# Altium PCB PCB1.PcbDoc
Units mm, origin at the board's own origin, x right, y up, seen from the top; angles counter-clockwise.
Board outline 81.69 x 40.11 mm, 2 copper layers (Top Layer, Bottom Layer); 24 components, 4 nets, 128 pads, 12 vias.
Unrouted connection lines stored in the file: 12.
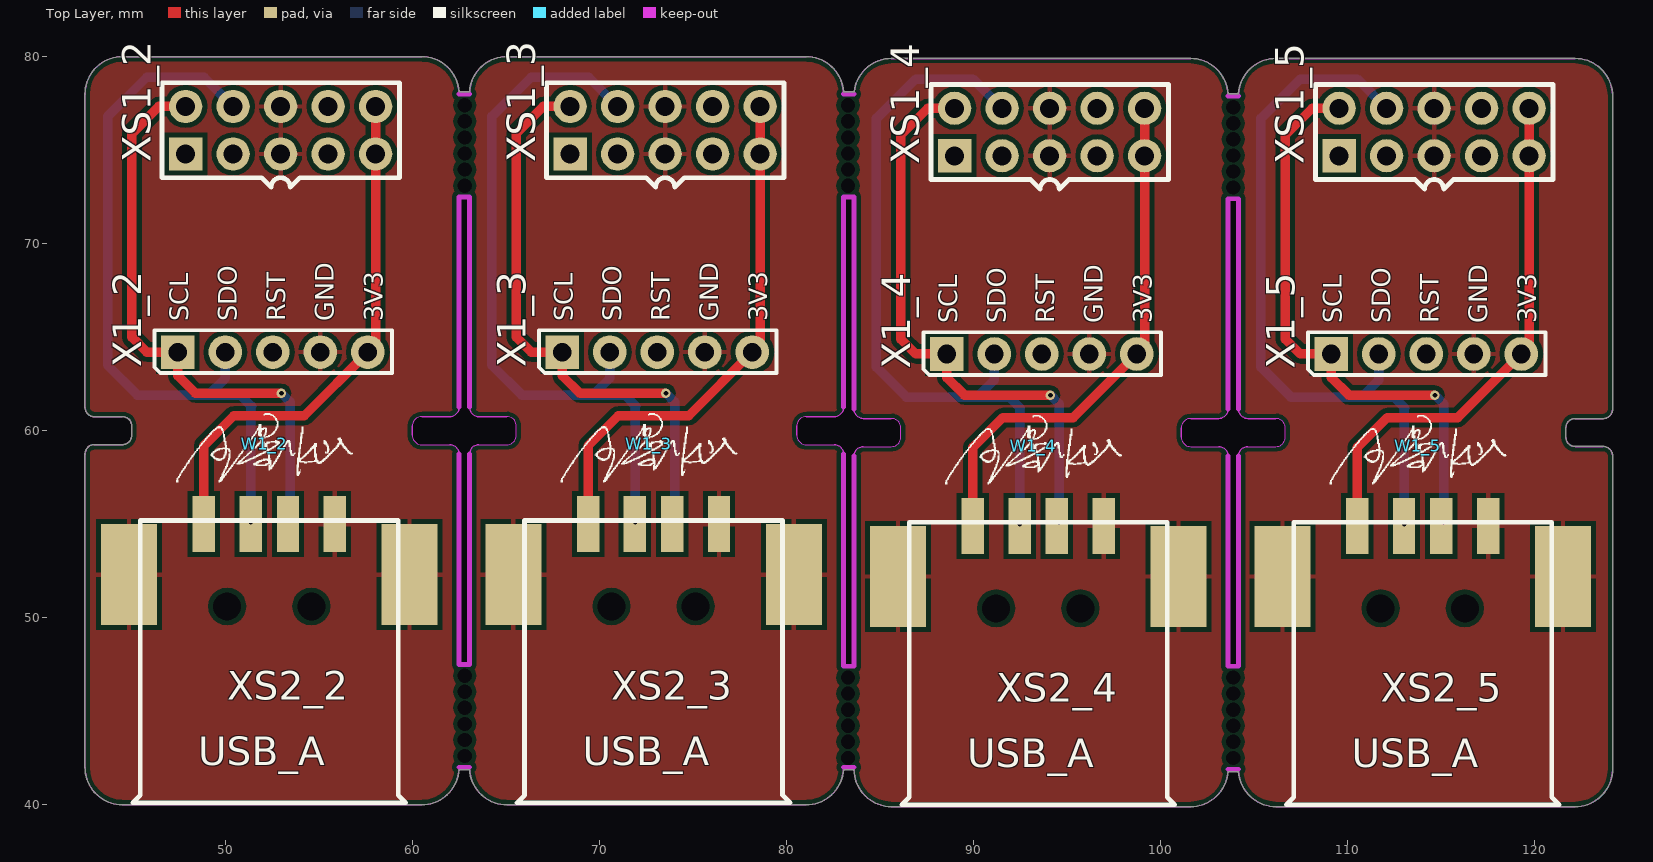
[diagram p0: Top Layer view]
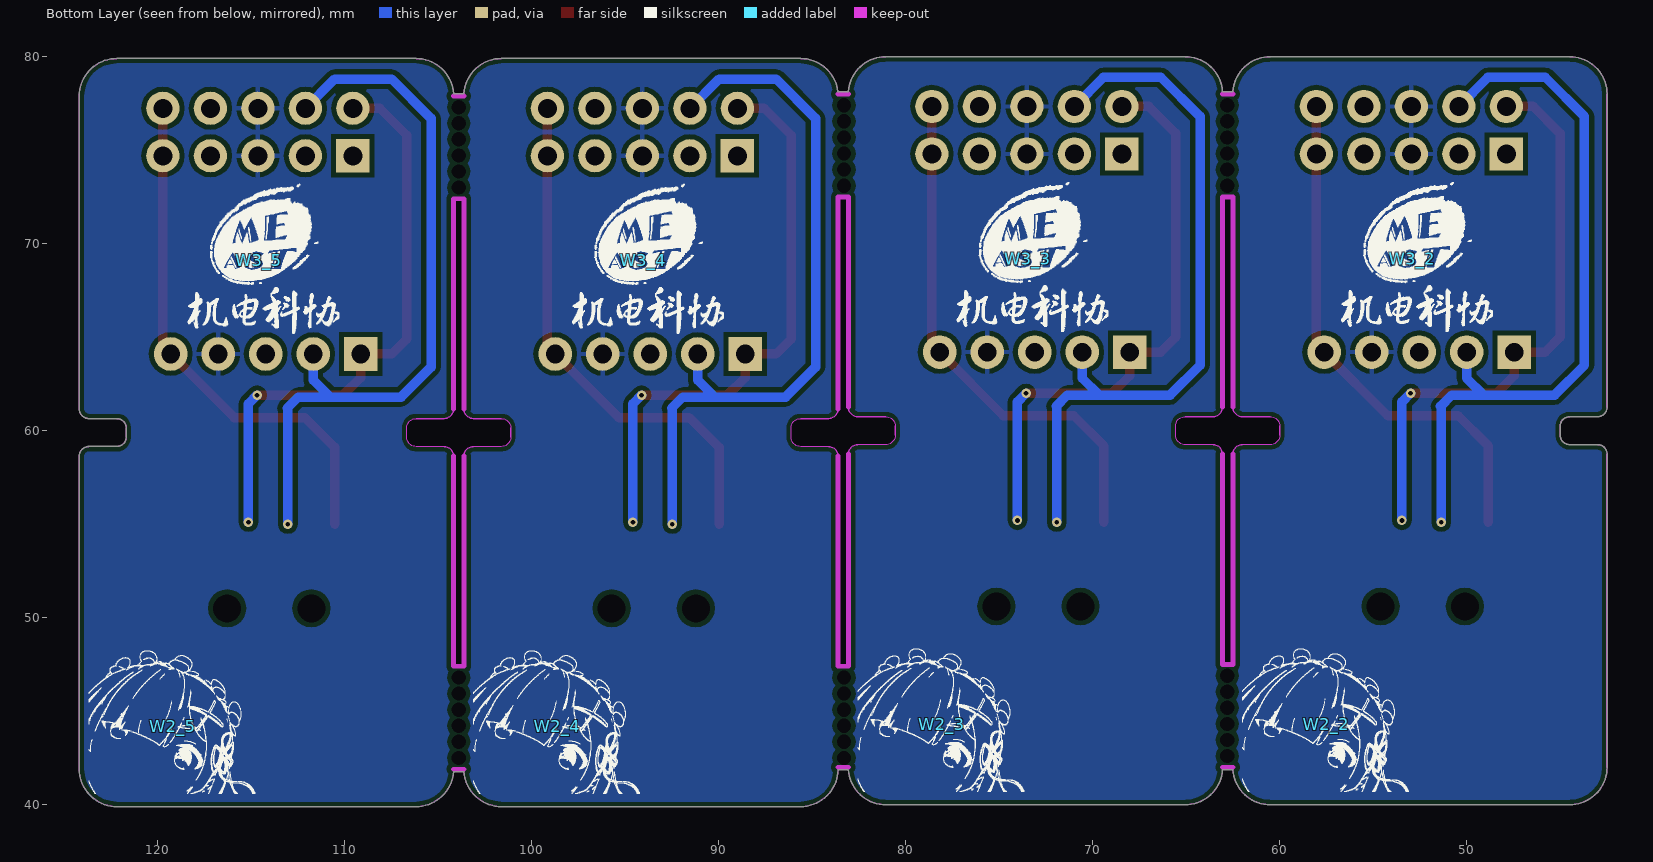
[diagram p1: Bottom Layer view, seen from below]

## Layer stack, top to bottom
Top Solder: solder mask 0.0102, Solder Resist, Dk 3.5
Top Layer: signal copper 0.0356
Dielectric 1: dielectric 0.32, FR-4, Dk 4.8
Bottom Layer: signal copper 0.0356
Bottom Solder: solder mask 0.0102, Solder Resist, Dk 3.5

## Board outline
42.493,42 ccw(c44.5,42) 44.5,39.993 60.5,39.993 ccw(c60.5,42) 62.503,41.873 63.057,41.873 ccw(c65.06,42) 65.06,39.993 81.06,39.993 ccw(c81.06,42) 83.063,41.873 83.613,41.873 ccw(c85.62,41.9) 85.62,39.893 101.62,39.893 ccw(c101.62,41.9) 103.623,41.773 104.177,41.773 ccw(c106.18,41.9) 106.18,39.893 122.18,39.893 ccw(c122.18,41.9) 124.187,41.9 124.187,58.65 ccw(c124.18,58.65) 124.187,58.65 ccw(c123.68,58.65) 123.68,59.157 122.18,59.157 cw(c122.18,59.15) 122.18,59.157 cw(c122.18,59.65) 121.687,59.65 121.687,60.15 cw(c122.18,60.15) 122.18,60.643 ccw(c122.18,60.65) 122.18,60.643 123.68,60.643 ccw(c123.68,61.15) 124.187,61.15 ccw(c124.18,61.15) 124.187,61.15 124.187,77.9 ccw(c122.18,77.9) 122.18,79.907 106.18,79.907 ccw(c106.18,77.9) 104.177,78.027 103.623,78.027 ccw(c101.62,77.9) 101.62,79.907 85.62,79.907 ccw(c85.62,77.9) 83.626,78.127 ccw(c83.62,78) 83.62,78.127 83.063,78.127 ccw(c81.06,78) 81.06,80.007 65.06,80.007 ccw(c65.06,78) 63.057,78.127 62.503,78.127 ccw(c60.5,78) 60.5,80.007 44.5,80.007 ccw(c44.5,78) 42.493,78 42.493,61.25 ccw(c42.5,61.25) 42.493,61.25 cw(c43,61.25) 42.493,61.25 ccw(c43,61.25) 43,60.743 44.5,60.743 cw(c44.5,60.25) 44.993,60.25 44.993,59.75 cw(c44.5,59.75) 44.5,59.257 ccw(c44.5,59.25) 44.5,59.257 43,59.257 ccw(c43,58.75) 42.493,58.75 ccw(c42.5,58.75) 42.493,58.75
cut-out: 80.56,59.75 ccw(c81.06,59.75) 81.06,59.25 82.56,59.25 cw(c82.56,58.75) 83.06,58.75 83.06,47.4 83.62,47.4 83.62,58.65 cw(c84.12,58.65) 84.12,59.15 85.62,59.15 ccw(c85.62,59.65) 86.12,59.65 86.12,60.15 ccw(c85.62,60.15) 85.62,60.65 84.12,60.65 cw(c84.12,61.15) 83.62,61.15 83.62,72.5 83.06,72.5 83.06,61.25 cw(c82.56,61.25) 82.56,60.75 81.06,60.75 ccw(c81.06,60.25) 80.56,60.25
cut-out: 81.06,59.243 ccw(c81.06,59.25)
cut-out: 81.06,59.243 ccw(c81.06,59.25)
cut-out: 101.12,59.65 ccw(c101.62,59.65) 101.62,59.15 103.12,59.15 cw(c103.12,58.65) 103.62,58.65 103.62,47.4 104.18,47.4 104.18,58.65 cw(c104.68,58.65) 104.68,59.15 106.18,59.15 ccw(c106.18,59.65) 106.68,59.65 106.68,60.15 ccw(c106.18,60.15) 106.18,60.65 104.68,60.65 cw(c104.68,61.15) 104.18,61.15 104.18,72.4 103.62,72.4 103.62,61.15 cw(c103.12,61.15) 103.12,60.65 101.62,60.65 ccw(c101.62,60.15) 101.12,60.15
cut-out: 81.06,59.243 ccw(c81.06,59.25)
cut-out: 81.06,59.243 ccw(c81.06,59.25)
cut-out: 81.06,59.243 ccw(c81.06,59.25)
cut-out: 60.5,59.25 62,59.25 cw(c62,58.75) 62.5,58.75 62.5,47.5 63.06,47.5 63.06,58.75 cw(c63.56,58.75) 63.56,59.25 65.06,59.25 ccw(c65.06,59.75) 65.56,59.75 65.56,60.25 ccw(c65.06,60.25) 65.06,60.75 63.56,60.75 cw(c63.56,61.25) 63.06,61.25 63.06,72.5 62.5,72.5 62.5,61.25 cw(c62,61.25) 62,60.75 60.5,60.75 ccw(c60.5,60.25) 60,60.25 60,59.75 ccw(c60.5,59.75)

## Design rules (kind name [scope] priority, off if disabled: settings)
Clearance [All] p1: gap=0.254 ignorepadtopadclearanceinfootprint=FALSE except(0: Arc-Hole Track-Hole SMDPad-Hole THPad-Hole Via-Hole Fill-Hole Poly-Hole Region-Hole Text-Hole)
PolygonConnect [All] p1: connectstyle=Relief reliefconductorwidth=0.254 reliefentries=4 polygonreliefangle="90 Angle" airgapwidth=0.254
RoutingVias [All] p1: holewidth=0.711 width=1.27 viastyle="Through Hole" minholewidth=0.711 minwidth=1.27 maxholewidth=0.711 maxwidth=1.27
SolderMaskExpansion [All] p1: expansion=0.102
Width [All] p1: maxlimit=1.27 minlimit=0.254 preferedwidth=0.254
30 further rules are at their usual default settings.

## Components (designator, comment, footprint, x,y, rotation, side; value= is the part's Value field where it differs from the comment)
W1_2 "手写体：王星灿" 手写体：王星灿 52.087,59.3 r0 top (schematic designator W1)
W1_3 "手写体：王星灿" 手写体：王星灿 72.647,59.3 r0 top (schematic designator W1)
W1_4 "手写体：王星灿" 手写体：王星灿 93.207,59.2 r0 top (schematic designator W1)
W1_5 "手写体：王星灿" 手写体：王星灿 113.767,59.2 r0 top (schematic designator W1)
W2_2 "蕾姆" 蕾姆360-340mil 57.5,44.3 r180 bottom (schematic designator W2)
W2_3 "蕾姆" 蕾姆360-340mil 78.06,44.3 r180 bottom (schematic designator W2)
W2_4 "蕾姆" 蕾姆360-340mil 98.62,44.2 r180 bottom (schematic designator W2)
W2_5 "蕾姆" 蕾姆360-340mil 119.18,44.2 r180 bottom (schematic designator W2)
W3_2 "科协徽章" 科协徽章2（310-310） 52.9,69.2 r180 bottom (schematic designator W3)
W3_3 "科协徽章" 科协徽章2（310-310） 73.46,69.2 r180 bottom (schematic designator W3)
W3_4 "科协徽章" 科协徽章2（310-310） 94.02,69.1 r180 bottom (schematic designator W3)
W3_5 "科协徽章" 科协徽章2（310-310） 114.58,69.1 r180 bottom (schematic designator W3)
X1_2 "SWD调试接口" SWD调试接口 47.46,64.2 r90 top (schematic designator X1)
X1_3 "SWD调试接口" SWD调试接口 68.02,64.2 r90 top (schematic designator X1)
X1_4 "SWD调试接口" SWD调试接口 88.58,64.1 r90 top (schematic designator X1)
X1_5 "SWD调试接口" SWD调试接口 109.14,64.1 r90 top (schematic designator X1)
XS1_2 "STlink-STM32F1牛角头" STlink-STM32F1牛角头 47.88,74.8 r90 top (schematic designator XS1)
XS1_3 "STlink-STM32F1牛角头" STlink-STM32F1牛角头 68.44,74.8 r90 top (schematic designator XS1)
XS1_4 "STlink-STM32F1牛角头" STlink-STM32F1牛角头 89,74.7 r90 top (schematic designator XS1)
XS1_5 "STlink-STM32F1牛角头" STlink-STM32F1牛角头 109.56,74.7 r90 top (schematic designator XS1)
XS2_2 "USB_A" USB_A母口180度贴片 52.35,55 r0 top (schematic designator XS2)
XS2_3 "USB_A" USB_A母口180度贴片 72.9,55 r0 top (schematic designator XS2)
XS2_4 "USB_A" USB_A母口180度贴片 93.47,54.9 r0 top (schematic designator XS2)
XS2_5 "USB_A" USB_A母口180度贴片 114.03,54.9 r0 top (schematic designator XS2)

## Footprints (in the part's own frame and the unit in brackets; to place one, negate y for a bottom-side part, rotate by r counter-clockwise, add the part's x,y. Pads: shape width x height; smd on the part's side, far side on the other; paste and mask are expansions set on the pad)
STlink-STM32F1牛角头 [mil]
  rect 70x70 hole 40: 1(0,0)
  round 70 hole 40: 2(100,0) 3(0,-100) 4(100,-100) 5(0,-200) 6(100,-200) 7(0,-300) 8(100,-300) 9(0,-400) 10(100,-400)
  silkscreen extent -70,-450 150,50
SWD调试接口 [mm]
  rect 1.8x1.8 hole 1: 1(0,0)
  round 1.8 hole 1: 2(0,-2.54) 3(0,-5.08) 4(0,-7.62) 5(0,-10.16)
  silkscreen extent -1.12,-11.46 1.17,1.24
USB_A母口180度贴片 [mm]
  rect 1.2x3 smd: 1(-3.5,0) 2(-1,0) 3(1,0) 5(3.5,0)
  rect 3x5.4 smd: 6(7.5,-2.7) 7(-7.5,-2.7)
  round 0 hole 1.5: 21(-2.25,-4.4) 21(2.25,-4.4)
  silkscreen extent -7.3,-14.9 7.3,0.2
手写体：王星灿 [mm]
  silkscreen extent -4.71,-2.03 4.74,1.63
科协徽章2（310-310） [mm]
  silkscreen extent -3.81,-3.92 4.3,4.06
蕾姆360-340mil [mm]
  silkscreen extent -4.5,-3.62 4.4,4.01

## Part data
XS2_2 XS2_3 XS2_4 XS2_5: library part USB_A母座

## Free pads (board coordinates)
  round 0 hole 0.762: 23(62.8,42.6) 23(62.8,43.46) 23(62.8,44.32) 23(62.8,45.18) 23(62.8,46.04) 23(62.8,46.9) 23(62.8,73.1) 23(62.8,73.96) 23(62.8,74.82) 23(62.8,75.68) 23(62.8,76.54) 23(62.8,77.4) 23(83.3,42.5) 23(83.3,43.36) 23(83.3,44.22) 23(83.3,45.08) 23(83.3,45.94) 23(83.3,46.8) 23(83.3,73.1) 23(83.3,73.96) 23(83.3,74.82) 23(83.3,75.68) 23(83.3,76.54) 23(83.3,77.4) 23(103.9,42.5) 23(103.9,43.36) 23(103.9,44.22) 23(103.9,45.08) 23(103.9,45.94) 23(103.9,46.8) 23(103.9,73) 23(103.9,73.86) 23(103.9,74.72) 23(103.9,75.58) 23(103.9,76.44) 23(103.9,77.3)

## Via types
v1: diameter 0.508, hole 0.254, Top Layer to Bottom Layer, 12 vias

## Nets (pads, with @x,y where several pads share a name; then routed paths per layer and width w, separated by ;. In a path a pad name is that pad's centre, name@x,y a point inside that pad or via, vN(x,y) a via of type N, cw(c..) or ccw(c..) an arc to the next point about the centre after c; other vN are vias at no path point)
+5: X1_2.5 X1_3.5 X1_4.5 X1_5.5 XS1_2.9 XS1_2.10 XS1_3.9 XS1_3.10 XS1_4.9 XS1_4.10 XS1_5.9 XS1_5.10 XS2_2.1 XS2_3.1 XS2_4.1 XS2_5.1 | length 113
  Top Layer w0.508: XS2_2.1@48.85,55.1 48.85,59.2 50.45,60.8 54.22,60.8 X1_2.5 58.04,64.62 XS1_2.9 XS1_2.10 ; XS2_3.1@69.41,55.1 69.41,59.2 71.01,60.8 74.78,60.8 X1_3.5 78.6,64.62 XS1_3.9 XS1_3.10 ; XS2_4.1@89.97,55 89.97,59.1 91.57,60.7 95.34,60.7 X1_4.5 99.16,64.52 XS1_4.9 XS1_4.10 ; XS2_5.1@110.53,55 110.53,59.1 112.13,60.7 115.9,60.7 X1_5.5 119.72,64.52 XS1_5.9 XS1_5.10
GND: X1_2.4 X1_3.4 X1_4.4 X1_5.4 XS1_2.5 XS1_2.6 XS1_3.5 XS1_3.6 XS1_4.5 XS1_4.6 XS1_5.5 XS1_5.6 XS2_2.5 XS2_2.6 XS2_2.7 XS2_3.5 XS2_3.6 XS2_3.7 XS2_4.5 XS2_4.6 XS2_4.7 XS2_5.5 XS2_5.6 XS2_5.7
SWCLK: X1_2.1 X1_3.1 X1_4.1 X1_5.1 XS1_2.2 XS1_3.2 XS1_4.2 XS1_5.2 XS2_2.3 XS2_3.3 XS2_4.3 XS2_5.3 | length 125.4
  Top Layer w0.508: XS1_2.2 46.44,77.34 45,75.9 45,65 45.8,64.2 X1_2.1 47.46,62.94 48.4,62 v1(53,62) ; XS1_3.2 67,77.34 65.56,75.9 65.56,65 66.36,64.2 X1_3.1 68.02,62.94 68.96,62 v1(73.56,62) ; XS1_4.2 87.56,77.24 86.12,75.8 86.12,64.9 86.92,64.1 X1_4.1 88.58,62.84 89.52,61.9 v1(94.12,61.9) ; XS1_5.2 108.12,77.24 106.68,75.8 106.68,64.9 107.48,64.1 X1_5.1 109.14,62.84 110.08,61.9 v1(114.68,61.9)
  Bottom Layer w0.508: v1(53,62) 53.461,61.539 v1(53.461,55.2) ; v1(73.56,62) 74.021,61.539 v1(74.021,55.2) ; v1(94.12,61.9) 94.581,61.439 v1(94.581,55.1) ; v1(114.68,61.9) 115.141,61.439 v1(115.141,55.1)
SWDIO: X1_2.2 X1_3.2 X1_4.2 X1_5.2 XS1_2.4 XS1_3.4 XS1_4.4 XS1_5.4 XS2_2.2 XS2_3.2 XS2_4.2 XS2_5.2 | length 156.1
  Bottom Layer w0.508: X1_2.2 50,62.8 49.1,61.9 ; XS1_2.4 48.861,78.899 45.799,78.899 43.7,76.8 43.7,63.5 45.3,61.9 49.1,61.9 ; v1(51.358,55.1) 51.358,61.258 51.4,61.3 50.8,61.9 49.1,61.9 ; X1_3.2 70.56,62.8 69.66,61.9 ; XS1_3.4 69.421,78.899 66.359,78.899 64.26,76.8 64.26,63.5 65.86,61.9 69.66,61.9 ; v1(71.918,55.1) 71.918,61.258 71.96,61.3 71.36,61.9 69.66,61.9 ; X1_4.2 91.12,62.7 90.22,61.8 ; XS1_4.4 89.981,78.799 86.919,78.799 84.82,76.7 84.82,63.4 86.42,61.8 90.22,61.8 ; v1(92.478,55) 92.478,61.158 92.52,61.2 91.92,61.8 90.22,61.8 ; X1_5.2 111.68,62.7 110.78,61.8 ; XS1_5.4 110.541,78.799 107.479,78.799 105.38,76.7 105.38,63.4 106.98,61.8 110.78,61.8 ; v1(113.038,55) 113.038,61.158 113.08,61.2 112.48,61.8 110.78,61.8
pads on no net: X1_2.3 X1_3.3 X1_4.3 X1_5.3 XS1_2.1 XS1_2.3 XS1_2.7 XS1_2.8 XS1_3.1 XS1_3.3 XS1_3.7 XS1_3.8 XS1_4.1 XS1_4.3 XS1_4.7 XS1_4.8 XS1_5.1 XS1_5.3 XS1_5.7 XS1_5.8 XS2_2.21 XS2_3.21 XS2_4.21 XS2_5.21

## Polygon pours and split planes (outlines as drawn)
GND on Bottom Layer "Bottom Layer-No Net" (solid, remove dead copper, pour order 24): 104.18,79.9 104.18,39.9 124.18,39.9 124.18,79.9
GND on Bottom Layer "Bottom Layer-No Net" (solid, remove dead copper, pour order 20): 83.62,79.9 83.62,39.9 103.62,39.9 103.62,79.9
GND on Bottom Layer "Bottom Layer-No Net" (solid, remove dead copper, pour order 16): 63.06,80 63.06,40 83.06,40 83.06,80
GND on Bottom Layer "Bottom Layer-No Net" (solid, remove dead copper, pour order 12): 42.5,80 42.5,40 62.5,40 62.5,80
GND on Top Layer "Top Layer-No Net" (solid, remove dead copper, pour order 26): 104.18,79.9 104.18,39.9 124.18,39.9 124.18,79.9
GND on Top Layer "Top Layer-No Net" (solid, remove dead copper, pour order 22): 83.62,79.9 83.62,39.9 103.62,39.9 103.62,79.9
GND on Top Layer "Top Layer-No Net" (solid, remove dead copper, pour order 18): 63.06,80 63.06,40 83.06,40 83.06,80
GND on Top Layer "Top Layer-No Net" (solid, remove dead copper, pour order 14): 42.5,80 42.5,40 62.5,40 62.5,80

## Keep-outs
Keep-Out Layer:
  lines w0.013: 62.5,42 cw(c60.5,42) 60.5,40 44.5,40 cw(c44.5,42) 42.5,42 42.5,58.75 cw(c43,58.75) 43,59.25 44.5,59.25 ccw(c44.5,59.75) 45,59.75 45,60.25 ccw(c44.5,60.25) 44.5,60.75 43,60.75 cw(c43,61.25) 42.5,61.25 42.5,78 cw(c44.5,78) 44.5,80 60.5,80 cw(c60.5,78) 62.5,78 ; 62.5,58.75 ccw(c62,58.75) 62,59.25 60.5,59.25 cw(c60.5,59.75) 60,59.75 60,60.25 cw(c60.5,60.25) 60.5,60.75 62,60.75 ccw(c62,61.25) 62.5,61.25 ; 63.06,42 ccw(c65.06,42) 65.06,40 81.06,40 ccw(c81.06,42) 83.06,42 ; 63.06,58.75 cw(c63.56,58.75) 63.56,59.25 65.06,59.25 ccw(c65.06,59.75) 65.56,59.75 65.56,60.25 ccw(c65.06,60.25) 65.06,60.75 63.56,60.75 cw(c63.56,61.25) 63.06,61.25 ; 63.06,78 cw(c65.06,78) 65.06,80 81.06,80 cw(c81.06,78) 83.06,78 ; 83.06,58.75 ccw(c82.56,58.75) 82.56,59.25 81.06,59.25 cw(c81.06,59.75) 80.56,59.75 80.56,60.25 cw(c81.06,60.25) 81.06,60.75 82.56,60.75 ccw(c82.56,61.25) 83.06,61.25 ; 83.62,41.9 ccw(c85.62,41.9) 85.62,39.9 101.62,39.9 ccw(c101.62,41.9) 103.62,41.9 ; 83.62,58.65 cw(c84.12,58.65) 84.12,59.15 85.62,59.15 ccw(c85.62,59.65) 86.12,59.65 86.12,60.15 ccw(c85.62,60.15) 85.62,60.65 84.12,60.65 cw(c84.12,61.15) 83.62,61.15 ; 83.62,77.9 cw(c85.62,77.9) 85.62,79.9 101.62,79.9 cw(c101.62,77.9) 103.62,77.9 ; 103.62,58.65 ccw(c103.12,58.65) 103.12,59.15 101.62,59.15 cw(c101.62,59.65) 101.12,59.65 101.12,60.15 cw(c101.62,60.15) 101.62,60.65 103.12,60.65 ccw(c103.12,61.15) 103.62,61.15 ; 104.18,41.9 ccw(c106.18,41.9) 106.18,39.9 122.18,39.9 ccw(c122.18,41.9) 124.18,41.9 124.18,58.65 ccw(c123.68,58.65) 123.68,59.15 122.18,59.15 cw(c122.18,59.65) 121.68,59.65 121.68,60.15 cw(c122.18,60.15) 122.18,60.65 123.68,60.65 ccw(c123.68,61.15) 124.18,61.15 124.18,77.9 ccw(c122.18,77.9) 122.18,79.9 106.18,79.9 ccw(c106.18,77.9) 104.18,77.9 ; 104.18,58.65 cw(c104.68,58.65) 104.68,59.15 106.18,59.15 ccw(c106.18,59.65) 106.68,59.65 106.68,60.15 ccw(c106.18,60.15) 106.18,60.65 104.68,60.65 cw(c104.68,61.15) 104.18,61.15
  lines w0.254: 62.5,42 63.06,42 ; 62.5,58.75 62.5,47.5 63.06,47.5 63.06,58.75 ; 62.5,61.25 62.5,72.5 63.06,72.5 63.06,61.25 ; 62.5,78 63.06,78 ; 83.06,42 83.62,42 ; 83.06,58.75 83.06,47.4 83.62,47.4 83.62,58.65 ; 83.06,61.25 83.06,72.5 83.62,72.5 83.62,61.15 ; 83.06,78 83.62,78 ; 103.62,41.9 104.18,41.9 ; 103.62,58.65 103.62,47.4 104.18,47.4 104.18,58.65 ; 103.62,61.15 103.62,72.4 104.18,72.4 104.18,61.15 ; 103.62,77.9 104.18,77.9

## Text inside footprints (layer, text, board x,y; h text height)
X1_2: Top Overlay "SCL" at 48.019,65.851 h1 r90; Top Overlay "SDO" at 50.616,65.851 h1 r90; Top Overlay "RST" at 53.213,65.851 h1 r90; Top Overlay "GND" at 55.81,65.851 h1 r90; Top Overlay "3V3" at 58.407,65.851 h1 r90
X1_3: Top Overlay "SCL" at 68.579,65.851 h1 r90; Top Overlay "SDO" at 71.176,65.851 h1 r90; Top Overlay "RST" at 73.773,65.851 h1 r90; Top Overlay "GND" at 76.37,65.851 h1 r90; Top Overlay "3V3" at 78.967,65.851 h1 r90
X1_4: Top Overlay "SCL" at 89.139,65.751 h1 r90; Top Overlay "SDO" at 91.736,65.751 h1 r90; Top Overlay "RST" at 94.333,65.751 h1 r90; Top Overlay "GND" at 96.93,65.751 h1 r90; Top Overlay "3V3" at 99.527,65.751 h1 r90
X1_5: Top Overlay "SCL" at 109.699,65.751 h1 r90; Top Overlay "SDO" at 112.296,65.751 h1 r90; Top Overlay "RST" at 114.893,65.751 h1 r90; Top Overlay "GND" at 117.49,65.751 h1 r90; Top Overlay "3V3" at 120.087,65.751 h1 r90